# EAGLE board Yitran_IT900_Hutschiene_1_1 (EAGLE 6.1)

Size 160 x 100 mm. Coordinates in mm from the lower left corner, seen from the top.
Outline: 0,0 160,0 160,100 0,100 0,0
Copper layers (1*16): Top 0.035mm / dielectric 1.5mm / Bottom 0.035mm
Design rules: minimum track width 10mil, minimum drill 24mil, track to track 8mil, track to pad 8mil, pad to pad 8mil, via to via 8mil, smd to smd 8mil, copper to edge 40mil, drill to drill 8mil, minimum pad ring 10mil, minimum via ring 8mil, stop-mask expansion 4mil, vias tented up to drill 0mil, thermal gap 10mil

## Footprints (pad centres in the part's own frame; a part is rotated, then mirrored left to right if it is on the bottom)
C1206K = smd 1.5 x 2: 1 -1.5,0; 2 1.5,0
E2,5-5 = drill 0.813 pad 1.6: + -1.27,0 | drill 0.813 pad 1.6 octagon: - 1.27,0
C150-091X182 = drill 1.016 octagon: 1 -7.493,0; 2 7.493,0
CB417-15 = drill 1.397 long: A 7.62,0; C -7.62,0
HLMP6 = drill 0.813 long: A -1.27,0; K 1.27,0
TR5 = drill 0.813 pad 1.778 long: 1 -2.54,0; 2 2.54,0
PIN2 = drill 1.4 pad 2.54 square: P$1 0,0
SO16L = smd 0.66 x 2.032: 1 -4.445,-4.902; 2 -3.175,-4.902; 3 -1.905,-4.902; 4 -0.635,-4.902; 5 0.635,-4.902; 6 1.905,-4.902; 7 3.175,-4.902; 8 4.445,-4.902; 9 4.445,4.902; 10 3.175,4.902; 11 1.905,4.902; 12 0.635,4.902; 13 -0.635,4.902; 14 -1.905,4.902; 15 -3.175,4.902; 16 -4.445,4.902
M1406 = smd 1.4 x 1.8: 1 -1.7,0; 2 1.7,0
R1206 = smd 1.6 x 1.803: 1 -1.422,0; 2 1.422,0
0309/10 = drill 0.813 octagon: 1 -5.08,0; 2 5.08,0
SJ_2W = smd 1.27 x 2.54: 1 -2.54,0; 2 0,0; 3 2.54,0
RECOM785X = drill 1 long: GND 0,2.54; VIN -2.54,2.54; VOUT 2.54,2.54
MODEM_FUSS = drill 0.7 pad 0.813 long: P$1 -20.32,-8.89; P$2 -19.05,-8.89; P$3 -17.78,-8.89; P$4 -16.51,-8.89; P$5 -15.24,-8.89; P$6 -13.97,-8.89; P$7 -12.7,-8.89; P$8 -11.43,-8.89; P$9 -10.16,-8.89; P$10 -8.89,-8.89; P$11 -7.62,-8.89; P$12 -6.35,-8.89; P$13 -5.08,-8.89; P$14 -3.81,-8.89; P$15 -2.54,-8.89; P$16 -1.27,-8.89; P$17 0,-8.89; P$18 1.27,-8.89; P$19 2.54,-8.89; P$20 3.81,-8.89; P$21 5.08,-8.89; P$22 6.35,-8.89; P$23 7.62,-8.89; P$24 8.89,-8.89; P$25 10.16,-8.89; P$29 -20.32,-3.937; P$30 -20.32,-5.207; P$31 -20.32,-6.477 | drill 0.7 pad 0.61 long: P$26 -20.32,-0.127; P$27 -20.32,-1.397; P$28 -20.32,-2.667
RAC04_12SA = drill 0.9 octagon: +VO 25.4,24.13; GND 28.575,24.13; L 31.75,3.175; N 25.4,3.175; NC 3.81,3.175; NC1 31.75,24.13
PLC-UEBERTRAGER_V2 = smd 2.54 x 1.27: 1LINE1 6.35,3.81; 2 6.35,1.27; 3 6.35,-1.27; 4LINE2 6.35,-3.81; 6NC -6.35,1.27; 7NC -6.35,-1.27; 8N -6.35,-3.81; L5 -6.35,3.81

## Placement (x,y rotation side)
C1  100n  [C1206K]  -52.07,69.85 0 top  (outside the outline)
C2  100n  [C1206K]  -57.15,69.85 0 top  (outside the outline)
C3  100n  [C1206K]  -62.23,69.85 0 top  (outside the outline)
C4  1µ  [E2,5-5]  12.7,33.02 0 top
C5  1µ  [E2,5-5]  -19.05,71.12 0 top  (outside the outline)
C6  100n  [C1206K]  -36.83,71.12 0 top  (outside the outline)
C11  470n  [C150-091X182]  67.31,20.32 0 top
C12  100n  [C1206K]  -67.31,69.85 0 top  (outside the outline)
C13  100n  [C1206K]  -15.24,76.2 0 top  (outside the outline)
C14  100n  [C1206K]  -20.32,76.2 0 top  (outside the outline)
C15  100n  [C1206K]  -41.91,71.12 0 top  (outside the outline)
D1  P6KEXXC  [CB417-15]  -22.86,63.5 0 top  (outside the outline)
D2  P6KE6V8C  [CB417-15]  -43.18,63.5 0 top  (outside the outline)
D3  Power_3,3V rot  [HLMP6]  -64.77,-2.54 0 top  (outside the outline)
D4  TxD gruen  [HLMP6]  -64.77,-7.62 0 top  (outside the outline)
F1  1A  [TR5]  88.9,26.67 0 top
GND  PN4  [PIN2]  -25.4,76.2 0 top  (outside the outline)
IC2  MAX3232CWE  [SO16L]  11.43,69.85 270 top
PL1  PN4  [PIN2]  -29.21,76.2 0 top  (outside the outline)
PL2  PN4  [PIN2]  -33.02,76.2 0 top  (outside the outline)
R1  100k  [M1406]  -57.15,64.77 0 top  (outside the outline)
R2  330R  [R1206]  -66.04,-12.7 0 top  (outside the outline)
R3  470k  [0309/10]  -27.94,69.85 0 top  (outside the outline)
R4  330R  [R1206]  -66.04,-19.05 0 top  (outside the outline)
RXD  PN4  [PIN2]  -36.83,76.2 0 top  (outside the outline)
SJ1  [SJ_2W]  -64.77,-26.67 0 top  (outside the outline)
TXD  PN4  [PIN2]  -40.64,76.2 0 top  (outside the outline)
U$1  RECOM_783_3  [RECOM785X]  31.75,58.42 0 top
U$3  MODEMSTECKER  [MODEM_FUSS]  30.48,15.24 0 top
U$9  RECOM_RAC04_12SA  [RAC04_12SA]  39.37,35.56 0 top
U$10  PLC_UEBERTRAGER_V2  [PLC-UEBERTRAGER_V2]  -49.53,55.88 0 top  (outside the outline)

## Library data of the parts
C1-C6 C11-C15 R1-R4 = resistor
D1 D2 = diode
D3 D4 = display-hp; MF: AGILENT TECHNOLOGIES; MPN: HLMP-6500; OC_FARNELL: 1652490; OC_NEWARK: 40K0088
F1 = fuse; OC_FARNELL: unknown; OC_NEWARK: unknown
GND PL1 PL2 RXD TXD = Strommessung
IC2 = maxim; MF: MAXIM; MPN: MAX3232CWE+; OC_FARNELL: 9725504; OC_NEWARK: 68K4630
SJ1 = jumper
U$1 U$3 U$9 U$10 = ADS

## Nets
33V: C3.1 C5.+ C6.1 C12.2 R1.2 R2.2 U$1.VOUT U$3.P$4 U$3.P$5
GND: C1.2 C2.2 C3.2 C4.- C5.- C6.2 C15.1 D3.K D4.K GND.P$1 IC2.15 SJ1.2 U$1.GND U$3.P$2 U$3.P$3 U$9.GND
L: C11.1 D1.C F1.2 R3.1 U$9.L
N: D1.A D2.A PL2.P$1 U$9.N U$10.8N
N$1: F1.1 PL1.P$1
N$2: C11.2 D2.C R3.2 U$10.L5
N$3: C2.1 C4.+ U$1.VIN U$9.+VO
N$4: D3.A R2.1
N$5: U$3.P$21 U$10.1LINE1
N$6: U$3.P$20 U$10.4LINE2
N$7: C13.1 IC2.1
N$8: C13.2 IC2.3
N$9: C14.1 IC2.4
N$10: C14.2 IC2.5
N$11: C12.1 IC2.2
N$12: C1.1 IC2.6
N$13: D4.A R4.1
N$14: SJ1.1 U$10.2
N$15: SJ1.3 U$10.3
N$16: IC2.11 U$3.P$16
N$18: IC2.12 U$3.P$17
N$19: C15.2 R1.1 U$3.P$9
RXD: IC2.13 RXD.P$1
TXD: IC2.14 R4.2 TXD.P$1
VCC: IC2.16

## Tracks (layer width: path | path; a pad name or v marks a point on that pad's centre or on a via)
33V  (8 unrouted)
GND  (15 unrouted)
L  (4 unrouted)
N  (4 unrouted)
N$1  (1 unrouted)
N$2  (3 unrouted)
N$3  (3 unrouted)
N$4  (1 unrouted)
N$5  (1 unrouted)
N$6  (1 unrouted)
N$7  (1 unrouted)
N$8  (1 unrouted)
N$9  (1 unrouted)
N$10  (1 unrouted)
N$11  (1 unrouted)
N$12  (1 unrouted)
N$13  (1 unrouted)
N$14  (1 unrouted)
N$15  (1 unrouted)
N$16  (1 unrouted)
N$18  (1 unrouted)
N$19  (2 unrouted)
RXD  (1 unrouted)
TXD  (2 unrouted)